# Altium PCB station_de_charge_PCB1.PcbDoc
Units mm, origin at the board's own origin, x right, y up, seen from the top; angles counter-clockwise.
Board outline 95 x 53.5 mm, 2 copper layers (Top Layer, Bottom Layer); 54 components, 28 nets, 125 pads, 13 vias.
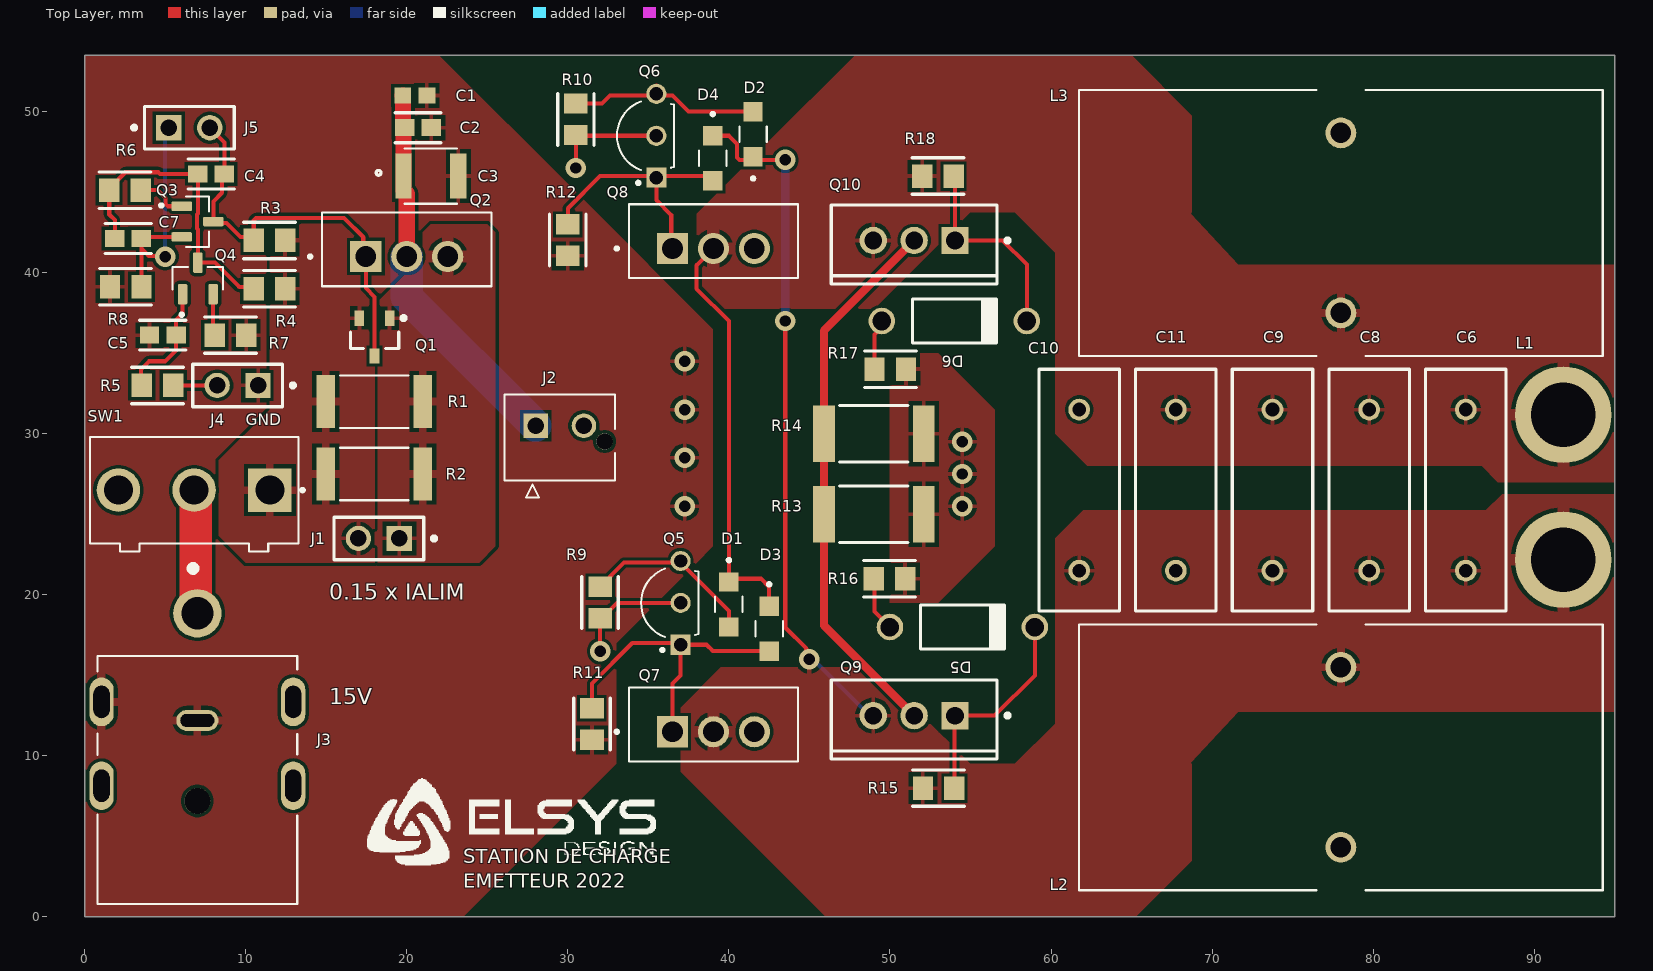
[diagram p0: Top Layer view]
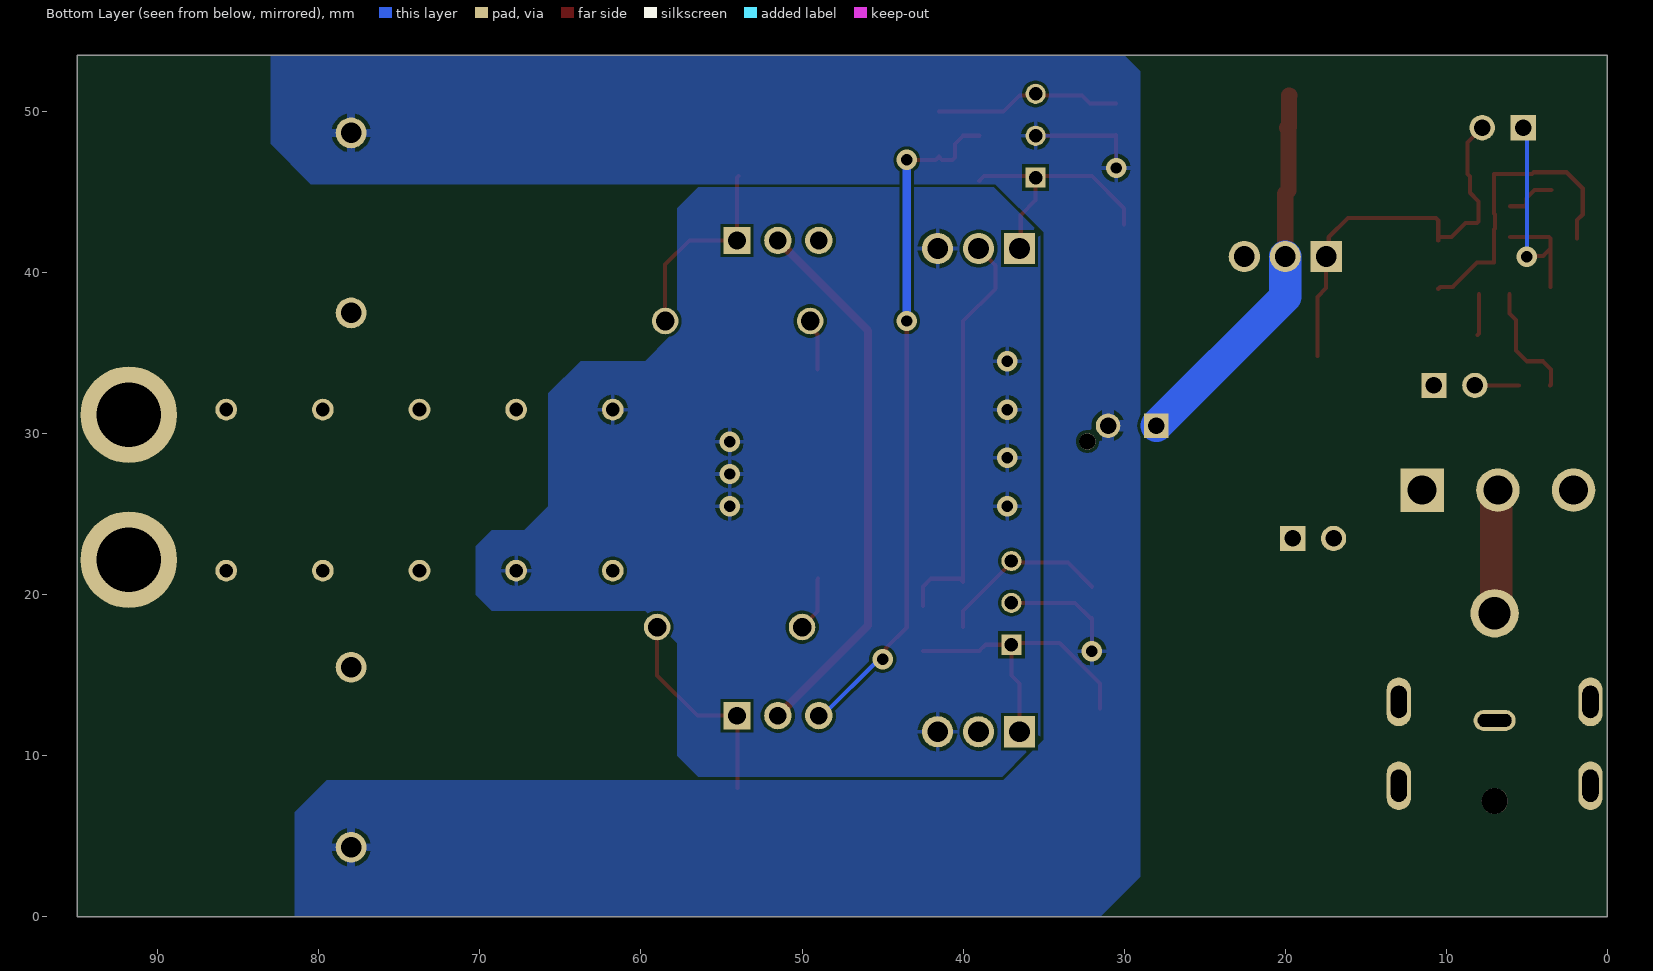
[diagram p1: Bottom Layer view, seen from below]
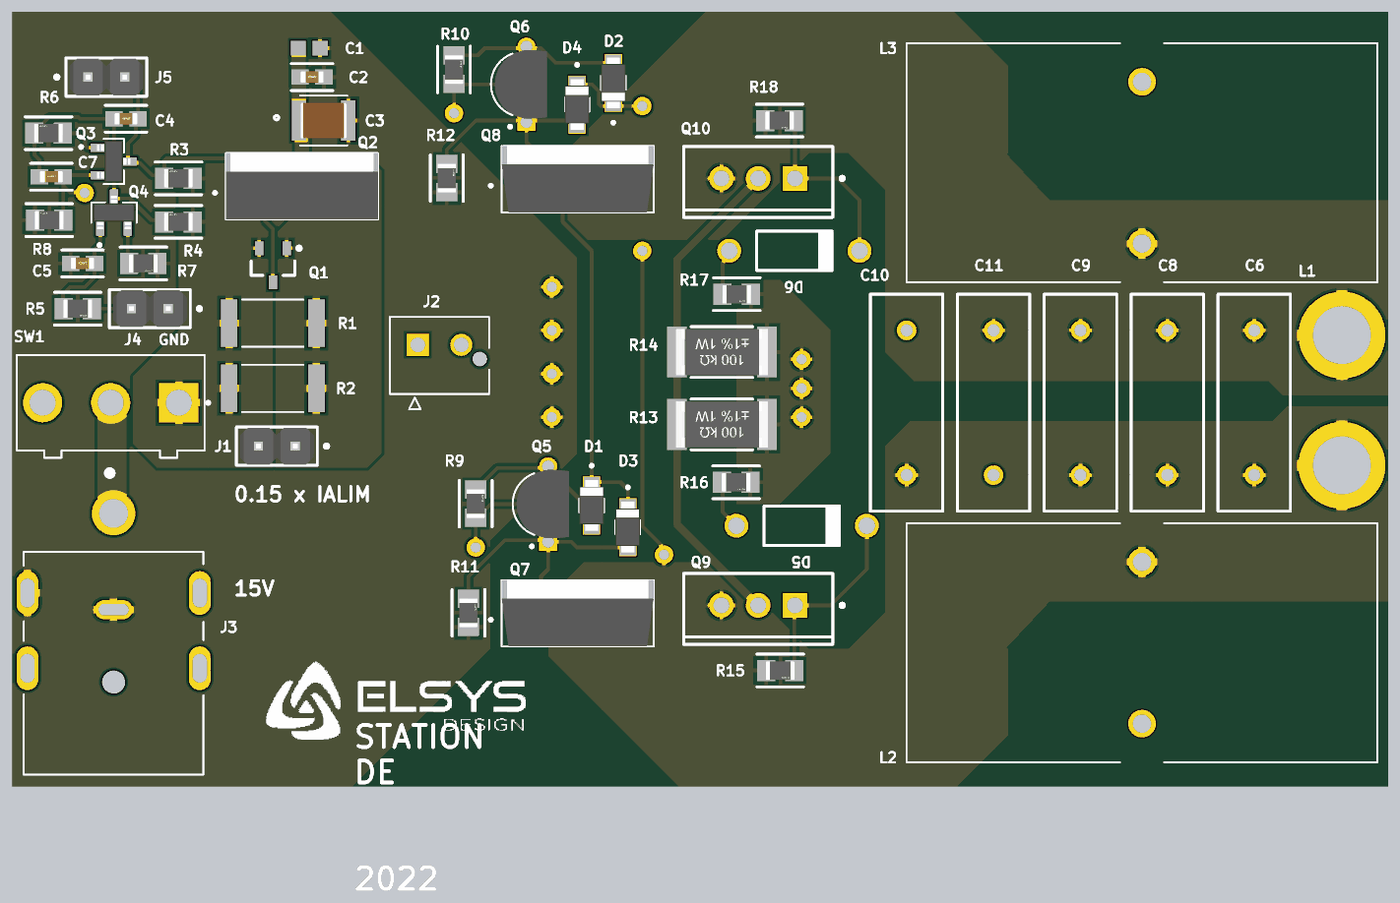
[diagram p2: 3D render of the assembled board from above, using the file's embedded part models]

## Layer stack, top to bottom
Top Solder: solder mask 0.0102, Solder Resist, Dk 3.5
Top Layer: signal copper 0.0356
Dielectric 1: dielectric 0.32, FR-4, Dk 4.8
Bottom Layer: signal copper 0.0356
Bottom Solder: solder mask 0.0102, Solder Resist, Dk 3.5

## Board outline
0,0 0,53.5 95,53.5 95,0

## Design rules (kind name [scope] priority, off if disabled: settings)
Clearance [All] p1: gap=0.2 ignorepadtopadclearanceinfootprint=FALSE
MinimumSolderMaskSliver [All] p1: minsoldermaskwidth=0.008
PolygonConnect [All] p1: connectstyle=Relief reliefconductorwidth=0.254 reliefentries=4 polygonreliefangle="90 Angle" airgapwidth=0.254
RoutingVias [All] p1: holewidth=0.711 width=1.27 viastyle="Through Hole" minholewidth=0.711 minwidth=1.27 maxholewidth=1.27 maxwidth=2
SilkToSolderMaskClearance [IsPad] p1: minsilkscreentomaskgap=0.008 clearancetoexposedcopper=TRUE
SolderMaskExpansion [All] p1: expansion=0.102 istentingtop=FALSE
Width [All] p1: maxlimit=3 minlimit=0.254 preferedwidth=0.254
28 further rules are at their usual default settings.

## Components (designator, comment, footprint, x,y, rotation, side; value= is the part's Value field where it differs from the comment)
C1 "1µF" CAPC1608X90X35NL15T15 20.5,51 r0 top
C2 "100nF" FP-C0603C104K5RAC3121-IPC_A 19.873,49 r0 top
C3 "10µf" CAPC3225X280N 21.5,46 r0 top
C4 "10nF" FP-C0603C104K5RAC3121-IPC_A 7.029,46.123 r0 top
C5 "10nF" FP-C0603C104K5RAC3121-IPC_A 4.029,36.123 r0 top
C6 "22nF 630VDC 10%" R60PF22205040K 85.75,21.5 r90 top
C7 "10nF" FP-C0603C104K5RAC3121-IPC_A 1.877,42.123 r0 top
C8 "22nF 630VDC 10%" R60PF22205040K 79.75,21.5 r90 top
C9 "22nF 630VDC 10%" R60PF22205040K 73.75,21.5 r90 top
C10 "33nF 400VDC" R60PF22205040K 61.75,21.5 r90 top
C11 "33nF 400VDC" R60PF22205040K 67.75,21.5 r90 top
D1 "PMEG6010ER,115" TVS_PTVS13VS1UR,115 40,18 r270 top
D2 "PMEG6010ER,115" TVS_PTVS13VS1UR,115 41.5,50 r90 top
D3 "PMEG6010ER,115" TVS_PTVS13VS1UR,115 42.5,16.5 r270 top
D4 "PMEG6010ER,115" TVS_PTVS13VS1UR,115 39,45.7 r270 top
D5 "1N4757A" FAIR-DO-41-2_V 54.5,18 r0 top
D6 "1N4757A" FAIR-DO-41-2_V 54,37 r0 top
J1 "*" FP-M20-9990246-MFG 18.27,23.5 r180 top
J2 "216571-2002" MOLEX_2165712002 28,30.5 r180 top
J3 "PJ-080BH" CUI_PJ-080BH 7,8.5 r90 top
J4 "M20-9990246" FP-M20-9990246-MFG 9.5,33 r180 top
J5 "M20-9990246" FP-M20-9990246-MFG 6.5,49 r0 top
L1 "loop" loop 91.8,22.175 r180 top
L2 "2212-V-RC" IND_HCTI-220-5.8 78,15.5 r270 top
L3 "2212-V-RC" IND_HCTI-220-5.8 78,37.5 r90 top
Q1 "TMBT3906,LM" FP-TMBT3906 18,36 r270 top
Q2 "IRF9Z30PBF-BE3" TO-220AB-3-package 20,41.453 r0 top
Q3 "BSS84AKVL" SOT95P230X110-3N 6.029,44.123 r0 top
Q4 "BC817K-25R" SOT95P230X110-3N 6.079,38.663 r90 top
Q5 "BC63916-D74Z" TO92127P478H483-3 37,19.5 r90 top
Q6 "BC63916-D74Z" TO92127P478H483-3 35.5,48.5 r90 top
Q7 "SIHF530-GE3" FP-SIHF530-GE3 36.5,11.5 r0 top
Q8 "SIHF530-GE3" FP-SIHF530-GE3 36.5,41.5 r0 top
Q9 "2N6491G" ONSC-TO-220-3-221A-09 51.5,12.5 r270 top
Q10 "2N6491G" ONSC-TO-220-3-221A-09 51.5,42 r270 top
R1 "300mOhm" RESC6331X70N 14.974,32 r0 top
R2 "300mOhm" RESC6331X70N 14.974,27.5 r0 top
R3 "ESR10EZPF4702" FP-ESR10-IPC_A 10.5,42 r0 top
R4 "10kOhm" FP-ESR10-IPC_A 10.5,39 r0 top
R5 "100Ohm" FP-ESR10-IPC_A 5.5,33 r180 top
R6 "1kOhm" FP-ESR10-IPC_A 1.529,45.123 r0 top
R7 "2kOhm" FP-ESR10-IPC_A 10.029,36.123 r180 top
R8 "33kOhm" FP-ESR10-IPC_A 1.575,39.123 r0 top
R9 "1kOhm" FP-ESR10-IPC_A 32,20.5 r270 top
R10 "1kOhm" FP-ESR10-IPC_A 30.5,50.5 r270 top
R11 "10kOhm" FP-ESR10-IPC_A 31.5,12.954 r270 top
R12 "10kOhm" FP-ESR10-IPC_A 30,43 r270 top
R13 "68Ohm 1W" FP-CRGCQ2512-IPC_A 49,25 r180 top
R14 "68Ohm 1W" FP-CRGCQ2512-IPC_A 49,30 r180 top
R15 "ESR10EZPF4702" FP-ESR10-IPC_A 54,8 r180 top
R16 "3.3kOhm" FP-ESR10-IPC_A 50.954,21 r180 top
R17 "3.3kOhm" FP-ESR10-IPC_A 51,34 r180 top
R18 "ESR10EZPF4702" FP-ESR10-IPC_A 53.954,46 r180 top
SW1 "MS12ANW03" SW_MS12ANW03 6.8,26.5 r180 top

## Footprints (in the part's own frame and the unit in brackets; to place one, negate y for a bottom-side part, rotate by r counter-clockwise, add the part's x,y. Pads: shape width x height; smd on the part's side, far side on the other; paste and mask are expansions set on the pad)
CAPC1608X90X35NL15T15 [mm] "Chip Capacitor, 2-Leads, Body 1.60x0.81mm, IPC Medium Density"
  rect 1.05x1 smd: 1(-0.75,0) 2(0.75,0)
  body extent -0.88,-0.48 0.87,0.48, height 0.9
CAPC3225X280N [mm]
  rect 1.01x2.81 smd: 1(-1.7,0) 2(1.7,0)
  silkscreen extent -3.4,-1.72 1.63,1.72, body extent -1.6,-1.25 1.6,1.25, height 2.81
CUI_PJ-080BH [mm]
  round 3 hole 2: 1(10.35,0)
  oval 1.308x2.616 hole 0.8 slot 2.1 at 90 deg: 2(3.7,0)
  oval 3.016x1.508 hole 1 slot 2 at 0 deg: 3(4.85,5.95) 4(-0.35,5.95) 5(-0.35,-5.95) 6(4.85,-5.95)
  round 1.6 hole 1.6 unplated: ""(-1.3,0)
  silkscreen extent -7.7,-6.2 13.34,6.2
FAIR-DO-41-2_V [mm] "2-Leads, Axial leaded, Body 2.72x5.2mm, Pin Spacing 9mm"
  round 1.65 hole 1.15: 1(-4.5,0) 2(4.5,0)
  silkscreen extent -2.6,-1.36 2.6,1.36, body extent -4.93,-1.36 4.93,1.36, height 2.71
FP-C0603C104K5RAC3121-IPC_A [mil]
  rect 47.5x41.66 smd paste+0 mask+0: 1(0,0) 2(65.03,0)
  silkscreen extent -24,-37 89,37, body extent -43,-41 108,41, height 10
FP-CRGCQ2512-IPC_A [mm]
  rect 1.358x3.506 smd paste+0 mask+0: 1(-3.102,0) 2(3.102,0)
  silkscreen extent -2.12,-1.75 2.12,1.75, body extent -4.28,-2.25 4.28,2.25, height 0.25
FP-ESR10-IPC_A [mm]
  rect 1.258x1.462 smd paste+0 mask+0: 1(0,0) 2(1.954,0)
  silkscreen extent -0.63,-1.13 2.58,1.13, body extent -1.13,-1.23 3.08,1.23, height 0.25
FP-M20-9990246-MFG [mm]
  rect 1.57x1.57 hole 1.02 paste-1000 mask+0: 1(-1.27,0)
  round 1.57 hole 1.02 paste-1000 mask+0: 2(1.27,0)
  silkscreen extent -3.55,-1.32 2.79,1.32, body extent -2.89,-1.42 2.89,1.42, height 0.25
FP-SIHF530-GE3 [mm]
  rect 1.935x1.935 hole 1.29: 1(0,0)
  round 1.935 hole 1.29: 2(2.54,0) 3(5.08,0)
  silkscreen extent -3.56,-1.84 7.79,2.75, body extent -2.71,-1.84 7.79,2.75, height 20.2
FP-TMBT3906 [mm] "SOT23, 3-Leads, Body 2,90x2,40mm, Pitch 0,95mm, IPC Medium Density"
  rect 0.95x0.6 smd: 1(-1.175,0.95) 2(-1.175,-0.95) 3(1.175,0)
  silkscreen extent -1.3,-1.5 0.7,1.93, body extent -0.7,-1.5 0.7,1.5, height 1
IND_HCTI-220-5.8 [mil]
  round 75 hole 50: 1(0,0) 2(440,0)
  silkscreen extent -105,-640 545,640
loop [mm]
  round 6 hole 4: 1(0,0) 2(0,-9)
MOLEX_2165712002 [mm]
  rect 1.52x1.52 hole 1.02 mask+0.076: 1(0,0)
  round 1.52 hole 1.02 mask+0.076: 2(-3,0)
  round 1.02 hole 1.02 unplated mask+0.076: ""(-4.28,0.98)
  silkscreen extent -4.92,-1.93 1.92,4.45
ONSC-TO-220-3-221A-09 [mm] "FM, 3-Leads, Body 10.3x4.85mm, Pitch 2.54mm"
  rect 1.7x1.7 hole 1.1: 1(0,2.54)
  round 1.7 hole 1.1: 2(0,0) 3(0,-2.54)
  silkscreen extent -2.2,-5.15 2.7,5.93, body extent -2.18,-5.15 2.67,5.15, height 19.85
R60PF22205040K [mm]
  round 1.35 hole 0.85: 1(0,0) 2(10,0)
  silkscreen extent -2.5,-2.5 12.5,2.5
RESC6331X70N [mm]
  rect 1.15x3.27 smd: 1(0,0) 2(6.026,0)
  silkscreen extent 0.89,-1.63 5.13,1.63
SOT95P230X110-3N [mm]
  rrect25% 1.26x0.59 smd: 1(0,0) 2(0,-1.9) 3(1.96,-0.95)
  silkscreen extent -1.37,-2.52 1.68,0.62, body extent -0.17,-2.4 2.13,0.5, height 1.1
SW_MS12ANW03 [mm]
  rect 2.7x2.7 hole 1.8: 1(-4.7,0)
  round 2.7 hole 1.8: 2(0,0) 3(4.7,0)
  silkscreen extent -6.83,-3.3 6.48,3.8
TO92127P478H483-3 [mm]
  rect 1.25x1.25 hole 0.83: 1(-2.6,0)
  round 1.25 hole 0.83: 2(0,0) 3(2.6,0)
  silkscreen extent -3.02,-1.1 2.13,2.45, body extent -2.38,-1.43 2.38,2.19, height 5.33
TO-220AB-3-package [mm]
  rect 1.94x1.94 hole 1.29: 1(-2.54,-0.453)
  round 1.94 hole 1.29: 2(0,-0.453) 3(2.54,-0.453)
  silkscreen extent -6.1,-2.29 5.25,2.29, body extent -5.25,-2.29 5.25,2.3, height 20.2
TVS_PTVS13VS1UR,115 [mm]
  rect 1.2x1.2 smd paste-0.05: 1(-2.8,0) 2(0,0)
  silkscreen extent -4.25,-0.85 -0.92,0.85, body extent -3.15,-0.85 0.35,0.85, height 1.1

## Part data
C1: library part C0603C105K4RACTU, "Cap Ceramic 1uF 16V X7R 10% SMD 0603 125°C Paper T/R", Capacitance=1uF, Case Code (Imperial)=0603, Case Code (Metric)=1608, Dielectric=X7R, Dielectric Material=Ceramic, Manufacturer=KEMET, Max Operating Temperature=125°C, Min Operating Temperature=-55°C, Package Quantity=4000, Supplier Part Number 1=80-C0603C105K4R, Tolerance=10%, Voltage=16V, Case/Package=0603, Category="Ceramic Capacitors", ComponentLink1Description=https://datasheet.ciiva.com/7823/kem-c1002-x7r-smd-7823997.pdf?src-supplier=Element14, ComponentLink1URL=https://datasheet.ciiva.com/7823/kem-c1002-x7r-smd-7823997.pdf?src-supplier=Element14, ComponentLink2Description=https://datasheet.ciiva.com/22749/kem-c1002-x7r-smd-22749721.pdf?src-supplier=Element14, ComponentLink2URL=https://datasheet.ciiva.com/22749/kem-c1002-x7r-smd-22749721.pdf?src-supplier=Element14, ComponentLink3Description=https://datasheet.ciiva.com/5419/kem-c1002-x7r-smd-5419750.pdf?src-supplier=Mouser, ComponentLink3URL=https://datasheet.ciiva.com/5419/kem-c1002-x7r-smd-5419750.pdf?src-supplier=Mouser, ComponentLink4Description=https://datasheet.ciiva.com/18192/getdatasheetpartid-385479-18192732.pdf?src-supplier=Verical, ComponentLink4URL=https://datasheet.ciiva.com/18192/getdatasheetpartid-385479-18192732.pdf?src-supplier=Verical, Construction=Flat, Contact Plating=Tin,Matte, Depth=0.8mm, Dissipation Factor=3.5%, Height=0.8mm, Length=1.6mm, Manufacturer Part Number=C0603C105K4RACTU, Mount="Surface Mount,PCB", Number of Pins=2, Packaging="Tape and Reel", Pricing 1="1=0,17000, 10=0,08000, 50=0,08000, 100=0,03600, 500=0,02600, 1000=0,02000, 2000=0,01900, 4000=0,01600, 8000=0,01400, 10000=0,01400 (USD)", Radiation Hardening=No, REACH SVHC="No SVHC", RoHS=Yes, RoHS Compliant=Yes, Series=C0603C, Stock 1=3280807, Supplier 1=Mouser, Termination=SMD/SMT, Thickness=0.034inch, Voltage Rating=16V, Voltage Rating (DC)=16V, Width=0.031inch
C2: library part C0603C104K5RAC3121, "Cap Ceramic 0.1uF 50V X7R 10% Pad SMD 0603 125°C T/R", Case/Package=0603, Manufacturer=KEMET, Supplier Part Number 1=80-C603C104K5RAC3121, Category="Ceramic Capacitors", Manufacturer Part Number=C0603C104K5RAC3121, Pricing 1="1=0,13000, 10=0,09200, 50=0,09200, 100=0,04300, 1000=0,02500, 10000=0,01900 (USD)", RoHS=Yes, RoHS Compliant=Yes, Stock 1=3306727, Supplier 1=Mouser
C3: library part C3225X7R2A106K250AC, "Multilayer Ceramic Chip Capacitors, Capacitance=10μF, LxWxT: 3.2x2.5x2.5mm", Manufacturer=TDK, Supplier Part Number 1=810-C3225X7R2A106K25, Manufacturer Part Number=C3225X7R2A106K250AC, Pricing 1="1=1,50000, 10=1,19000, 50=1,19000, 100=0,89100, 1000=0,72000, 10000=0,72000 (USD)", RoHS=No, Stock 1=11549, Supplier 1=Mouser
C4 C5 C7: library part C0603C103K5RAC7013, "Cap Ceramic 0.01uF 50V X7R 10% Pad SMD 0603 125C T/R", Case/Package=0603, Dielectric=X7R, Dielectric Material=Ceramic, Manufacturer=KEMET, Max Operating Temperature=125°C, Min Operating Temperature=-55°C, Package Quantity=4000, Supplier Part Number 1=80-C0603C103K5RC7013, Tolerance=10%, Voltage Rating=50V, Capacitance=10nF, Category="Ceramic Capacitors", ComponentLink1Description=http://components.arrow.com/part/dataview/5297356S5600630N7429?src-supplier=Arrow+Electronics, ComponentLink1URL=http://components.arrow.com/part/dataview/5297356S5600630N7429?src-supplier=Arrow+Electronics, ComponentLink2Description=https://www.distrelec.biz/Web/Downloads/_t/ds/KEM_C1002_X7R_SMD_eng_tds.pdf?mime=application%2Fpdf&src-supplier=Distrelec, ComponentLink2URL=https://www.distrelec.biz/Web/Downloads/_t/ds/KEM_C1002_X7R_SMD_eng_tds.pdf?mime=application%2Fpdf&src-supplier=Distrelec, ComponentLink3Description=https://api.kemet.com/component-edge/download/datasheet/C0603C103K5RAC7013.pdf?src-supplier=Digi-Key, ComponentLink3URL=https://api.kemet.com/component-edge/download/datasheet/C0603C103K5RAC7013.pdf?src-supplier=Digi-Key, Depth=0.8mm, Height=0.8mm, Length=1.6mm, Manufacturer Part Number=C0603C103K5RAC7013, Mount="Surface Mount", Packaging="Tape and Reel", Pricing 1="1=0,13000, 10=0,05100, 50=0,05100, 100=0,04300, 500=0,03000, 1000=0,02500, 2000=0,02300, 4000=0,02000, 10000=0,02000 (USD)", Radiation Hardening=No, RoHS=Yes, Stock 1=21368, Supplier 1=Mouser, Thickness=0.035inch, Voltage Rating (DC)=50V, Width=0.031inch
C6 C8 C9: library part R60PF22205040K, "Cap Film 0.022uF 630V PET 10%( 13 X 4 X 9mm) Radial Wound 10mm 105C Automotive Bag", Capacitance=22nF, Case/Package=Radial, Dielectric=PET, Manufacturer=KEMET, Max Operating Temperature=105°C, Min Operating Temperature=-55°C, Supplier Part Number 1=80-R60PF22205040K, Tolerance=10%, Voltage Rating=630V, Voltage Rating (AC)=220V, Category="Film Capacitors", ComponentLink1Description=http://www.farnell.com/datasheets/1959821.pdf?src-supplier=Farnell, ComponentLink1URL=http://www.farnell.com/datasheets/1959821.pdf?src-supplier=Farnell, ComponentLink2Description=http://www.farnell.com/datasheets/1959821.pdf?src-supplier=Element14, ComponentLink2URL=http://www.farnell.com/datasheets/1959821.pdf?src-supplier=Element14, ComponentLink3Description=http://www.kemet.com/docfinder?Partnumber=R60&src-supplier=Digi-Key, ComponentLink3URL=http://www.kemet.com/docfinder?Partnumber=R60&src-supplier=Digi-Key, Dielectric Material=PET, Height - Seated (Max)=0.394inch, Lead Pitch=0.394inch, Length=0.512inch, Manufacturer Part Number=R60PF22205040K, Mount="Through Hole", Packaging=Bulk, Pricing 1="1=0,67000, 10=0,49600, 50=0,39700, 100=0,34000, 1000=0,22700, 10000=0,21200 (USD)", REACH SVHC="No SVHC", RoHS=Yes, RoHS Compliant=Yes, Stock 1=1035, Supplier 1=Mouser, Termination="PC Pins", Voltage Rating (DC)=630V, Width=0.157inch
C10 C11: library part R76MF233050H3J, "Double Metallized Polypropylene Film Capacitor", Manufacturer=KEMET, Supplier Part Number 1=80-R76MF233050H3J, Category="Film Capacitors", Manufacturer Part Number=R76MF233050H3J, Pricing 1="1=0,69000, 10=0,48900, 50=0,37000, 100=0,32200, 1000=0,20300, 10000=0,19000 (USD)", RoHS=Yes, Stock 1=1718, Supplier 1=Mouser
D1 D2 D3 D4: "DIODE SCHOTTKY 60V 1A SOD123W", Manufacturer=Nexperia, Supplier Part Number 1=771-PMEG6010ER115, Category="Rectifier Diodes", ComponentLink1Description=http://www.farnell.com/datasheets/1383349.pdf?src-supplier=Farnell, ComponentLink1URL=http://www.farnell.com/datasheets/1383349.pdf?src-supplier=Farnell, ComponentLink2Description=https://assets.nexperia.com/documents/data-sheet/PMEG6010ER.pdf?src-supplier=Digi-Key, ComponentLink2URL=https://assets.nexperia.com/documents/data-sheet/PMEG6010ER.pdf?src-supplier=Digi-Key, Manufacturer Part Number=PMEG6010ER,115, Pricing 1="1=0,44000, 10=0,33300, 50=0,33300, 100=0,20700, 500=0,14200, 1000=0,10900, 3000=0,09200, 9000=0,08400, 10000=0,08400, 24000=0,07800, 45000=0,07600 (USD)", RoHS=Yes, RoHS Compliant=Yes, Stock 1=80739, Supplier 1=Mouser
D5 D6: "Diode Zener Single 51V 5% 1000mW 2-Pin DO-41", Case/Package=DO-41-2, Manufacturer="ON Semiconductor / Fairchild", Max Operating Temperature=200°C, Max Power Dissipation=1W, Max Reverse Current=5uA, Min Operating Temperature=-65°C, Package Quantity=1000, Supplier Part Number 1=512-1N4757A, Test Current=5mA, Tolerance=5%, Voltage Rating (DC)=51V, Category="Zener Diodes", ComponentLink1Description=https://datasheet.ciiva.com/4732/1n4757a-188306-4732517.pdf?src-supplier=Mouser, ComponentLink1URL=https://datasheet.ciiva.com/4732/1n4757a-188306-4732517.pdf?src-supplier=Mouser, ComponentLink2Description=https://datasheet.ciiva.com/897/1n4731a-897602.pdf?src-supplier=Digi-Key, ComponentLink2URL=https://datasheet.ciiva.com/897/1n4731a-897602.pdf?src-supplier=Digi-Key, ComponentLink3Description=https://datasheet.ciiva.com/8346/1n4730a-8346458.pdf?src-supplier=Avnet, ComponentLink3URL=https://datasheet.ciiva.com/8346/1n4730a-8346458.pdf?src-supplier=Avnet, ComponentLink4Description=https://datasheet.ciiva.com/16818/1n4757a-16818154.pdf?src-supplier=Future+Electronics, ComponentLink4URL=https://datasheet.ciiva.com/16818/1n4757a-16818154.pdf?src-supplier=Future+Electronics, Element Configuration=Single, Impedance=95R, Lead Free="Lead Free", Manufacturer Part Number=1N4757A, Max Reverse Leakage Current=5uA, Mount="Through Hole", Number of Pins=2, Packaging=Bulk, Power Dissipation=1W, Power Rating=1W, Pricing 1="1=0,35000, 10=0,28600, 50=0,28600, 100=0,15200, 500=0,10000, 1000=0,06800, 3000=0,05300, 9000=0,04500, 10000=0,04500, 24000=0,04200, 45000=0,03800 (USD)", Radiation Hardening=No, RoHS=Yes, RoHS Compliant=Yes, Stock 1=12862, Supplier 1=Mouser, Voltage Tolerance=5%, Weight=0.245g, Working Voltage=51V, Zener Current=5mA, Zener Voltage=51V
J1: library part M20-9990246, "2.54mm (0.1\") Pitch SIL Vertical PC Tail Pin Header, 6.1mm mating pin height, tin, 2 contacts", Case/Package=SIL, Color=Black, Contact Resistance=30mR, Current Rating=3A, Insulation Resistance=10GR, Manufacturer=Harwin, Max Operating Temperature=105°C, Min Operating Temperature=-40°C, Package Quantity=1000, Supplier Part Number 1=855-M20-9990246, Voltage Rating (AC)=750V, Category="Headers and Wire Housings", ComponentLink1Description=https://datasheet.ciiva.com/8046/315376-8046930.pdf?src-supplier=Element14, ComponentLink1URL=https://datasheet.ciiva.com/8046/315376-8046930.pdf?src-supplier=Element14, ComponentLink2Description=https://datasheet.ciiva.com/11745/0900766b81034e61-11745755.pdf?src-supplier=RSComponents, ComponentLink2URL=https://datasheet.ciiva.com/11745/0900766b81034e61-11745755.pdf?src-supplier=RSComponents, ComponentLink3Description=https://datasheet.ciiva.com/22660/1830818-22660571.pdf?src-supplier=Element14, ComponentLink3URL=https://datasheet.ciiva.com/22660/1830818-22660571.pdf?src-supplier=Element14, ComponentLink4Description=https://datasheet.ciiva.com/6833/m20-999-6833368.pdf?src-supplier=Digi-Key, ComponentLink4URL=https://datasheet.ciiva.com/6833/m20-999-6833368.pdf?src-supplier=Digi-Key, ComponentLink5Description=https://datasheet.ciiva.com/26852/getdatasheetpartid-384170-26852203.pdf?src-supplier=Verical, ComponentLink5URL=https://datasheet.ciiva.com/26852/getdatasheetpartid-384170-26852203.pdf?src-supplier=Verical, Connector Type="Male Pin", Contact Material=Brass,Bronze, Contact Mating Length=0.24inch, Contact Plating=Tin, Depth=2.54mm, Gender=Male, Housing Color=Black, Housing Material=Nylon, Length=5.08mm, Manufacturer Part Number=M20-9990246, Max Current Rating=3A, Mount="Through Hole", Number of Contacts=2, Number of Positions=2, Number of Rows=1, Orientation=Straight, Packaging=Bulk, Pitch=2.54mm, Pricing 1="1=0,17000, 10=0,08400, 50=0,08400, 100=0,07000, 500=0,06300, 1000=0,05400, 2000=0,04600, 10000=0,04500, 25000=0,03700, 50000=0,03500 (USD)", Radiation Hardening=No, REACH SVHC="No SVHC", RoHS=Yes, Stock 1=121083, Supplier 1=Mouser, Termination=Solder
J2: "Connector Power Header 2Position 3mm PC Pin Straight Through Hole 2 Terminal 1 Port Tray", Manufacturer=Molex, Supplier Part Number 1=538-216571-2002, Manufacturer Part Number=216571-2002, Pricing 1="1=1,67000, 10=1,19000, 50=1,19000, 100=1,04000, 576=1,02000, 1000=1,02000, 1152=0,89300, 2592=0,87100, 5184=0,84000, 10000=0,84000, 10080=0,80200 (USD)", RoHS=No, Stock 1=4447, Supplier 1=Mouser
J3: "Power Barrel Connector Jack 2.50mm ID (0.098\"), 5.50mm OD (0.217\") Through Hole,", Color=Black, Current Rating=10A, Manufacturer=CUI, Max Operating Temperature=85°C, Min Operating Temperature=-25°C, Supplier Part Number 1=CP-080BHCT-ND, Category=Connectors, ComponentLink1Description=https://www.cui.com/product/resource/digikeypdf/pj-080bh.pdf?src-supplier=Digi-Key, ComponentLink1URL=https://www.cui.com/product/resource/digikeypdf/pj-080bh.pdf?src-supplier=Digi-Key, Connector Type=Jack, Contact Material=Brass, Contact Plating=Silver, Gender=Male, Housing Color=Black, Housing Material=Nylon, Lead Free="Lead Free", Manufacturer Part Number=PJ-080BH, Mount="Through Hole", Number of Conductors=2, Orientation=Horizontal, Packaging="Tape and Reel", RoHS=Yes, RoHS Compliant=Yes, Series=-, Shielding=Shielded, Supplier 1=Digi-Key, Termination=Solder
J4 J5: "2.54mm (0.1\") Pitch SIL Vertical PC Tail Pin Header, 6.1mm mating pin height, tin, 2 contacts", Case/Package=SIL, Color=Black, Contact Resistance=30mR, Current Rating=3A, Insulation Resistance=10GR, Manufacturer=Harwin, Max Operating Temperature=105°C, Min Operating Temperature=-40°C, Package Quantity=1000, Supplier Part Number 1=855-M20-9990246, Voltage Rating (AC)=750V, Category="Headers and Wire Housings", ComponentLink1Description=https://datasheet.ciiva.com/8046/315376-8046930.pdf?src-supplier=Element14, ComponentLink1URL=https://datasheet.ciiva.com/8046/315376-8046930.pdf?src-supplier=Element14, ComponentLink2Description=https://datasheet.ciiva.com/11745/0900766b81034e61-11745755.pdf?src-supplier=RSComponents, ComponentLink2URL=https://datasheet.ciiva.com/11745/0900766b81034e61-11745755.pdf?src-supplier=RSComponents, ComponentLink3Description=https://datasheet.ciiva.com/22660/1830818-22660571.pdf?src-supplier=Element14, ComponentLink3URL=https://datasheet.ciiva.com/22660/1830818-22660571.pdf?src-supplier=Element14, ComponentLink4Description=https://datasheet.ciiva.com/6833/m20-999-6833368.pdf?src-supplier=Digi-Key, ComponentLink4URL=https://datasheet.ciiva.com/6833/m20-999-6833368.pdf?src-supplier=Digi-Key, ComponentLink5Description=https://datasheet.ciiva.com/26852/getdatasheetpartid-384170-26852203.pdf?src-supplier=Verical, ComponentLink5URL=https://datasheet.ciiva.com/26852/getdatasheetpartid-384170-26852203.pdf?src-supplier=Verical, Connector Type="Male Pin", Contact Material=Brass,Bronze, Contact Mating Length=0.24inch, Contact Plating=Tin, Depth=2.54mm, Gender=Male, Housing Color=Black, Housing Material=Nylon, Length=5.08mm, Manufacturer Part Number=M20-9990246, Max Current Rating=3A, Mount="Through Hole", Number of Contacts=2, Number of Positions=2, Number of Rows=1, Orientation=Straight, Packaging=Bulk, Pitch=2.54mm, Pricing 1="1=0,17000, 10=0,08400, 50=0,08400, 100=0,07000, 500=0,06300, 1000=0,05400, 2000=0,04600, 10000=0,04500, 25000=0,03700, 50000=0,03500 (USD)", Radiation Hardening=No, REACH SVHC="No SVHC", RoHS=Yes, Stock 1=121083, Supplier 1=Mouser, Termination=Solder
L2 L3: "Inductor High Current Toroid 100uH/64uH 15% 1KHz 4.4A 56mOhm DCR RDL", Case/Package=Radial, Current Rating=4.4A, DC Resistance (DCR)=56mR, Inductance=100uH, Inductance Tolerance=15%, Manufacturer="Bourns JW Miller", Max Operating Temperature=105°C, Min Operating Temperature=-55°C, Package Quantity=77, Supplier Part Number 1=542-2212-V-RC, Test Frequency=1kHz, Category="Fixed Inductors", ComponentLink1Description=https://datasheet.ciiva.com/11798/0900766b80fa5688-11798051.pdf?src-supplier=RSComponents, ComponentLink1URL=https://datasheet.ciiva.com/11798/0900766b80fa5688-11798051.pdf?src-supplier=RSComponents, ComponentLink2Description=https://datasheet.ciiva.com/6690/2200-series-6690646.pdf?src-supplier=Digi-Key, ComponentLink2URL=https://datasheet.ciiva.com/6690/2200-series-6690646.pdf?src-supplier=Digi-Key, ComponentLink3Description=https://datasheet.ciiva.com/28654/2200-series-28654982.pdf?src-supplier=Element14, ComponentLink3URL=https://datasheet.ciiva.com/28654/2200-series-28654982.pdf?src-supplier=Element14, ComponentLink4Description=https://datasheet.ciiva.com/3076/2200-series-3076522.pdf?src-supplier=Avnet, ComponentLink4URL=https://datasheet.ciiva.com/3076/2200-series-3076522.pdf?src-supplier=Avnet, Contact Plating=Tin, Core Material=Ferrite, DC Current=4.4A, Depth=13.97mm, Diameter=0.95inch, Height - Seated (Max)=0.55inch, Lead Diameter=0.86mm, Lead Free="Lead Free", Lead Pitch=11.176mm, Lead/Base Style=Radial, Manufacturer Part Number=2212-V-RC, Max DC Current=4.4A, Military Standard=Not, Mount="Through Hole,Radial", Number of Pins=2, Packaging=Bulk, Pricing 1="1=4,88000, 10=4,48000, 50=3,72000, 100=2,93000, 1000=2,93000, 10000=2,93000 (USD)", Radiation Hardening=No, REACH SVHC="No SVHC", RMS Current (Irms)=4.4A, RoHS=Yes, RoHS Compliant=Yes, Series=2200, Shielding=Shielded, Stock 1=1501, Supplier 1=Mouser, Termination=Radial, Tolerance=15%, Width=0.55inch
Q1: "TRANSPNP50V0.15ASOT23-3", Case/Package=TO-236-3, Collector Emitter Breakdown Voltage=50V, Collector Emitter Voltage (VCEO)=400mV, Manufacturer=Toshiba, Max Collector Current=150mA, Max Power Dissipation=320mW, Supplier Part Number 1=757-TMBT3906LM, Transition Frequency=250MHz, Category=BJTs, ComponentLink1Description=http://www.mouser.com/ds/2/408/TMBT3906_datasheet_en_20150108-736658.pdf?src-supplier=Mouser, ComponentLink1URL=http://www.mouser.com/ds/2/408/TMBT3906_datasheet_en_20150108-736658.pdf?src-supplier=Mouser, ComponentLink2Description=https://toshiba.semicon-storage.com/info/docget.jsp?did=29746&prodName=TMBT3906&src-supplier=Digi-Key, ComponentLink2URL=https://toshiba.semicon-storage.com/info/docget.jsp?did=29746&prodName=TMBT3906&src-supplier=Digi-Key, Manufacturer Part Number=TMBT3906,LM, Max Breakdown Voltage=50V, Mount="Surface Mount", Packaging="Tape and Reel", Pricing 1="1=0,18000, 10=0,16800, 50=0,16800, 100=0,09100, 500=0,05600, 1000=0,03900, 3000=0,02900, 9000=0,02500, 10000=0,02500, 24000=0,02200, 45000=0,01900 (USD)", RoHS=Yes, Stock 1=7851, Supplier 1=Mouser
Q2: Manufacturer="Vishay Siliconix", Supplier Part Number 1=78-IRF9Z30PBF-BE3, Manufacturer Part Number=IRF9Z30PBF-BE3, Pricing 1="1=2,94000, 10=2,65000, 25=2,50000, 50=2,50000, 100=2,13000, 500=1,75000, 1000=1,44000, 2000=1,40000, 10000=1,40000 (USD)", RoHS=No, Stock 1=1837, Supplier 1=Mouser
Q3: "BSS84AKV/SOT666/SOT6", Manufacturer=Nexperia, Supplier Part Number 1=771-BSS84AKVL, Manufacturer Part Number=BSS84AKVL, Pricing 1="1=0,24000, 10=0,20200, 50=0,20200, 100=0,10800, 500=0,07100, 1000=0,04800, 2500=0,03800, 10000=0,03100 (USD)", RoHS=Yes, RoHS Compliant=Yes, Stock 1=4944, Supplier 1=Mouser
Q4: "BC817K-25H/SOT23/TO-236AB", Manufacturer=Nexperia, Supplier Part Number 1=771-BC817K-25R, Category=BJTs, Manufacturer Part Number=BC817K-25R, Pricing 1="1=0,24000, 10=0,19900, 50=0,19900, 100=0,10600, 1000=0,04800, 10000=0,03100 (USD)", RoHS=No, RoHS Compliant=Yes, Stock 1=50401, Supplier 1=Mouser
Q5 Q6: "NPN Medium Power Transistor", Manufacturer="ON Semiconductor / Fairchild", Supplier Part Number 1=512-BC63916D74Z, Category=BJTs, ComponentLink1Description=https://www.onsemi.com/pub/Collateral/BC63916-D.PDF?src-supplier=Digi-Key, ComponentLink1URL=https://www.onsemi.com/pub/Collateral/BC63916-D.PDF?src-supplier=Digi-Key, Manufacturer Part Number=BC63916-D74Z, Pricing 1="1=0,37000, 10=0,30600, 50=0,30600, 100=0,20800, 1000=0,11700, 10000=0,09500 (USD)", RoHS=Yes, RoHS Compliant=Yes, Stock 1=60363, Supplier 1=Mouser
Q7 Q8: Manufacturer=Vishay, Supplier Part Number 1=78-SIHF530-GE3, Manufacturer Part Number=SIHF530-GE3, Pricing 1="1=0,97000, 10=0,85800, 50=0,85800, 100=0,65700, 1000=0,41600, 10000=0,36600 (USD)", RoHS=No, Stock 1=547, Supplier 1=Mouser
Q9 Q10: "Power Bipolar Transistor, 15A, 8", Case/Package=TO-220-3, Collector Base Voltage (VCBO)=90V, Collector Emitter Breakdown Voltage=80V, Collector Emitter Saturation Voltage=3.5V, Current Rating=15A, Emitter Base Voltage (VEBO)=5V, Frequency=5MHz, Manufacturer="ON Semiconductor", Max Operating Temperature=150°C, Max Power Dissipation=1.8W, Min Operating Temperature=-65°C, Package Quantity=50, Supplier Part Number 1=863-2N6491G, Voltage Rating (DC)=-80V, Category=BJTs, Collector Emitter Voltage (VCEO)=80V, Collector-emitter Voltage-Max=3.5V, ComponentLink1Description=https://datasheet.ciiva.com/15138/getdatasheetpartid-42144-15138735.pdf?src-supplier=Verical, ComponentLink1URL=https://datasheet.ciiva.com/15138/getdatasheetpartid-42144-15138735.pdf?src-supplier=Verical, ComponentLink2Description=https://datasheet.ciiva.com/978/2n6487-d-978689.pdf?src-supplier=Digi-Key, ComponentLink2URL=https://datasheet.ciiva.com/978/2n6487-d-978689.pdf?src-supplier=Digi-Key, ComponentLink3Description=https://datasheet.ciiva.com/1260/2n6487-d-1260672.pdf?src-supplier=Newark, ComponentLink3URL=https://datasheet.ciiva.com/1260/2n6487-d-1260672.pdf?src-supplier=Newark, ComponentLink4Description=https://datasheet.ciiva.com/30480/0900766b8126cbeb-30480658.pdf?src-supplier=RSComponents, ComponentLink4URL=https://datasheet.ciiva.com/30480/0900766b8126cbeb-30480658.pdf?src-supplier=RSComponents, ComponentLink5Description=https://datasheet.ciiva.com/1215/79212-1215972.pdf?src-supplier=Farnell, ComponentLink5URL=https://datasheet.ciiva.com/1215/79212-1215972.pdf?src-supplier=Farnell, ComponentLink6Description=https://datasheet.ciiva.com/3303/2n6487-d-3303896.pdf?src-supplier=Avnet, ComponentLink6URL=https://datasheet.ciiva.com/3303/2n6487-d-3303896.pdf?src-supplier=Avnet, Contact Plating=Tin,Matte, Element Configuration=Single, Gain Bandwidth Product=5MHz, Height=15.75mm, hFE Min=20, Lead Free="Lead Free", Length=10.28mm, Manufacturer Part Number=2N6491G, Max Collector Current=15A, Max Frequency=5MHz, Number of Elements=1, Number of Pins=3, Packaging=Rail/Tube, Polarity=PNP, Power Dissipation=1.8W, Pricing 1="1=1,12000, 10=1,01000, 50=0,95200, 100=0,95200, 1000=0,95200, 10000=0,95200 (USD)", Radiation Hardening=No, REACH SVHC="No SVHC", RoHS=Yes, RoHS Compliant=Yes, Series=-, Stock 1=1110, Supplier 1=Mouser, Transition Frequency=5MHz, Weight=0.01lb, Width=4.82mm
R1 R2: library part CRL2512-JW-R300ELF, "Res Thick Film 2512 0.3 Ohm 5% 1W ±200ppm/°C Molded SMD SMD Embossed Plastic T/R", Case Code (Imperial)=2512, Case Code (Metric)=6432, Manufacturer=Bourns, Max Operating Temperature=125°C, Max Power Dissipation=1W, Min Operating Temperature=-55°C, Package Quantity=4000, Resistance=300mR, Resistor Type="Thick Film", Supplier Part Number 1=652-CRL2512JWR300ELF, Temperature Coefficient=200ppm/°C, Tolerance=5%, Case/Package=2512, Category="Chip SMD Resistors", ComponentLink1Description=https://datasheet.ciiva.com/9120/crl-9120009.pdf?src-supplier=Avnet, ComponentLink1URL=https://datasheet.ciiva.com/9120/crl-9120009.pdf?src-supplier=Avnet, Contact Plating=Tin, Height=0.028inch, Length=0.248inch, Manufacturer Part Number=CRL2512-JW-R300ELF, Mount="Surface Mount", Number of Terminations=2, Packaging="Tape and Reel", Power Rating=1W, Pricing 1="1=0,69000, 10=0,51000, 50=0,51000, 100=0,29700, 1000=0,16700, 10000=0,15600 (USD)", Radiation Hardening=No, RoHS=Yes, RoHS Compliant=Yes, Series=CRL, Stock 1=2644, Supplier 1=Mouser, Termination=SMD/SMT, Width=3.1mm
R3 R15 R18: "Res Thick Film 0805 47K Ohm 1% 0.4W ±100ppm/C Pad SMD Automotive T/R", Case Code (Imperial)=0805, Case Code (Metric)=2012, Manufacturer=Rohm, Max Operating Temperature=155°C, Max Power Dissipation=400mW, Min Operating Temperature=-55°C, Package Quantity=1, Resistance=47kR, Resistor Type="Thick Film", Supplier Part Number 1=755-ESR10EZPF4702, Temperature Coefficient=100ppm/°C, Tolerance=1%, Case/Package=0805, Category="Chip SMD Resistors", ComponentLink1Description=https://datasheet.ciiva.com/2469/esr-2469981.pdf?src-supplier=Digi-Key, ComponentLink1URL=https://datasheet.ciiva.com/2469/esr-2469981.pdf?src-supplier=Digi-Key, ComponentLink2Description=https://datasheet.ciiva.com/2469/esr-2469979.pdf?src-supplier=Digi-Key, ComponentLink2URL=https://datasheet.ciiva.com/2469/esr-2469979.pdf?src-supplier=Digi-Key, ComponentLink3Description=https://datasheet.ciiva.com/2469/esr-2469980.pdf?src-supplier=Digi-Key, ComponentLink3URL=https://datasheet.ciiva.com/2469/esr-2469980.pdf?src-supplier=Digi-Key, Features="Automotive AEC-Q200", Height=0.026inch, Length=0.079inch, Manufacturer Part Number=ESR10EZPF4702, Number of Terminations=2, Packaging="Tape and Reel", Pricing 1="1=0,18000, 10=0,15300, 50=0,15300, 100=0,06000, 1000=0,02600, 2500=0,02300, 5000=0,02000, 10000=0,02000 (USD)", RoHS=Yes, RoHS Compliant=Yes, Series=ESR, Stock 1=31570, Supplier 1=Mouser, Width=0.049inch
R4 R11 R12: library part ESR10EZPF1002, "Res Thick Film 0805 10K Ohm 1% 0.4W ±100ppm/C Pad SMD Automotive T/R", Case Code (Imperial)=0805, Case Code (Metric)=2012, Manufacturer=Rohm, Max Operating Temperature=155°C, Max Power Dissipation=400mW, Min Operating Temperature=-55°C, Package Quantity=1, Resistance=10kR, Resistor Type="Thick Film", Supplier Part Number 1=755-ESR10EZPF1002, Temperature Coefficient=100ppm/°C, Tolerance=1%, Case/Package=0805, Category="Chip SMD Resistors", ComponentLink1Description=https://datasheet.ciiva.com/2469/esr-2469862.pdf?src-supplier=Digi-Key, ComponentLink1URL=https://datasheet.ciiva.com/2469/esr-2469862.pdf?src-supplier=Digi-Key, ComponentLink2Description=https://datasheet.ciiva.com/2469/esr-2469863.pdf?src-supplier=Digi-Key, ComponentLink2URL=https://datasheet.ciiva.com/2469/esr-2469863.pdf?src-supplier=Digi-Key, ComponentLink3Description=https://datasheet.ciiva.com/2469/esr-2469864.pdf?src-supplier=Digi-Key, ComponentLink3URL=https://datasheet.ciiva.com/2469/esr-2469864.pdf?src-supplier=Digi-Key, Features="Automotive AEC-Q200", Height=0.026inch, Length=0.079inch, Manufacturer Part Number=ESR10EZPF1002, Number of Terminations=2, Packaging="Tape and Reel", Pricing 1="1=0,18000, 10=0,15300, 50=0,15300, 100=0,06000, 1000=0,02600, 2500=0,02300, 5000=0,02000, 10000=0,02000 (USD)", RoHS=Yes, RoHS Compliant=Yes, Series=ESR, Stock 1=82018, Supplier 1=Mouser, Width=0.049inch
R5: library part ESR10EZPF1000, "Res Thick Film 0805 100 Ohm 1% 2/5W ±100ppm/°C Molded SMD Paper T/R", Case Code (Imperial)=0805, Case Code (Metric)=2012, Manufacturer=Rohm, Max Operating Temperature=155°C, Max Power Dissipation=400mW, Min Operating Temperature=-55°C, Resistance=100R, Resistor Type="Thick Film", Supplier Part Number 1=755-ESR10EZPF1000, Temperature Coefficient=100ppm/°C, Tolerance=1%, Case/Package=0805, Category="Chip SMD Resistors", ComponentLink1Description=http://www.farnell.com/datasheets/2611941.pdf?src-supplier=Farnell, ComponentLink1URL=http://www.farnell.com/datasheets/2611941.pdf?src-supplier=Farnell, ComponentLink2Description=https://www.rohm.com/datasheet/ESR01MZPF/esr-e?src-supplier=Digi-Key, ComponentLink2URL=https://www.rohm.com/datasheet/ESR01MZPF/esr-e?src-supplier=Digi-Key, ComponentLink3Description=http://www.farnell.com/datasheets/2611941.pdf?src-supplier=Newark, ComponentLink3URL=http://www.farnell.com/datasheets/2611941.pdf?src-supplier=Newark, ComponentLink4Description=http://rohmfs.rohm.com/en/products/databook/datasheet/passive/resistor/chip_resistor/esr.pdf?src-supplier=Avnet, ComponentLink4URL=http://rohmfs.rohm.com/en/products/databook/datasheet/passive/resistor/chip_resistor/esr.pdf?src-supplier=Avnet, Features="Automotive AEC-Q200", Manufacturer Part Number=ESR10EZPF1000, Number of Terminations=2, Packaging="Tape and Reel", Pricing 1="1=0,18000, 10=0,15300, 50=0,15300, 100=0,06000, 1000=0,02600, 10000=0,02000 (USD)", RoHS=Yes, RoHS Compliant=Yes, Series=ESR, Stock 1=17116, Supplier 1=Mouser
R6 R9 R10: library part ESR10EZPF1001, "Res Thick Film 0805 1K Ohm 1% 0.4W ±100ppm/C Epoxy Resin Pad SMD Automotive T/R", Case Code (Imperial)=0805, Case Code (Metric)=2012, Manufacturer=Rohm, Max Operating Temperature=155°C, Max Power Dissipation=400mW, Min Operating Temperature=-55°C, Package Quantity=1, Resistance=1kR, Resistor Type="Thick Film", Supplier Part Number 1=755-ESR10EZPF1001, Temperature Coefficient=100ppm/°C, Tolerance=1%, Case/Package=0805, Category="Chip SMD Resistors", ComponentLink1Description=https://datasheet.ciiva.com/2470/esr-2470004.pdf?src-supplier=Digi-Key, ComponentLink1URL=https://datasheet.ciiva.com/2470/esr-2470004.pdf?src-supplier=Digi-Key, ComponentLink2Description=https://datasheet.ciiva.com/2470/esr-2470005.pdf?src-supplier=Digi-Key, ComponentLink2URL=https://datasheet.ciiva.com/2470/esr-2470005.pdf?src-supplier=Digi-Key, ComponentLink3Description=https://datasheet.ciiva.com/2470/esr-2470003.pdf?src-supplier=Digi-Key, ComponentLink3URL=https://datasheet.ciiva.com/2470/esr-2470003.pdf?src-supplier=Digi-Key, Features="Automotive AEC-Q200", Height=0.026inch, Lead Free="Lead Free", Length=0.079inch, Manufacturer Part Number=ESR10EZPF1001, Number of Terminations=2, Packaging="Tape and Reel", Power Rating=400mW, Pricing 1="1=0,18000, 10=0,15300, 50=0,15300, 100=0,06000, 1000=0,02600, 10000=0,02000 (USD)", RoHS=Yes, RoHS Compliant=Yes, Series=ESR, Size Code=0805, Stock 1=27313, Supplier 1=Mouser, Width=0.049inch
R7: library part ESR10EZPF2001, "Res Thick Film 0805 2K Ohm 1% 2/5W ±100ppm/°C Molded SMD Paper T/R", Case Code (Imperial)=0805, Case Code (Metric)=2012, Manufacturer=Rohm, Max Power Dissipation=400mW, Package Quantity=5000, Resistance=2kR, Resistor Type="Thick Film", Supplier Part Number 1=755-ESR10EZPF2001, Temperature Coefficient=100ppm/°C, Tolerance=1%, Case/Package=0805, Category="Chip SMD Resistors", ComponentLink1Description=http://www1.futureelectronics.com/doc/ROHM%20SEMICONDUCTOR/ESR10EZPD.pdf?src-supplier=Future+Electronics, ComponentLink1URL=http://www1.futureelectronics.com/doc/ROHM%20SEMICONDUCTOR/ESR10EZPD.pdf?src-supplier=Future+Electronics, ComponentLink2Description=https://www.rohm.com/datasheet/ESR01MZPF/esr-e?src-supplier=Digi-Key, ComponentLink2URL=https://www.rohm.com/datasheet/ESR01MZPF/esr-e?src-supplier=Digi-Key, ComponentLink3Description=http://www.rohm.com/web/global/datasheet/ESR01MZPF/esr-e?src-supplier=Digi-Key, ComponentLink3URL=http://www.rohm.com/web/global/datasheet/ESR01MZPF/esr-e?src-supplier=Digi-Key, ComponentLink4Description=http://rohmfs.rohm.com/en/products/databook/datasheet/passive/resistor/chip_resistor/esr.pdf?src-supplier=Avnet, ComponentLink4URL=http://rohmfs.rohm.com/en/products/databook/datasheet/passive/resistor/chip_resistor/esr.pdf?src-supplier=Avnet, Height=0.026inch, Lead Free="Lead Free", Length=0.079inch, Manufacturer Part Number=ESR10EZPF2001, Number of Terminations=2, Packaging="Tape and Reel", Power Rating=400mW, Pricing 1="1=0,18000, 10=0,15300, 50=0,15300, 100=0,06000, 1000=0,02600, 10000=0,02000 (USD)", RoHS=Yes, RoHS Compliant=Yes, Series=ESR10, Size Code=0805, Stock 1=82201, Supplier 1=Mouser, Width=0.049inch
R8: library part ESR10EZPJ333, "Res Thick Film 0805 33K Ohm 5% 0.4W ±200ppm/C Pad SMD Automotive T/R", Case Code (Imperial)=0805, Case Code (Metric)=2012, Manufacturer=Rohm, Max Operating Temperature=155°C, Max Power Dissipation=400mW, Min Operating Temperature=-55°C, Package Quantity=1, Resistance=33kR, Resistor Type="Thick Film", Supplier Part Number 1=755-ESR10EZPJ333, Temperature Coefficient=200ppm/°C, Tolerance=5%, Case/Package=0805, Category="Chip SMD Resistors", ComponentLink1Description=https://datasheet.ciiva.com/2495/esr-2495380.pdf?src-supplier=Digi-Key, ComponentLink1URL=https://datasheet.ciiva.com/2495/esr-2495380.pdf?src-supplier=Digi-Key, ComponentLink2Description=https://datasheet.ciiva.com/2495/esr-2495381.pdf?src-supplier=Digi-Key, ComponentLink2URL=https://datasheet.ciiva.com/2495/esr-2495381.pdf?src-supplier=Digi-Key, ComponentLink3Description=https://datasheet.ciiva.com/2495/esr-2495382.pdf?src-supplier=Digi-Key, ComponentLink3URL=https://datasheet.ciiva.com/2495/esr-2495382.pdf?src-supplier=Digi-Key, Features="Automotive AEC-Q200", Height=0.026inch, Length=0.079inch, Manufacturer Part Number=ESR10EZPJ333, Number of Terminations=2, Packaging="Tape and Reel", Pricing 1="1=0,10000, 10=0,08600, 50=0,08600, 100=0,03300, 1000=0,01500, 10000=0,01100 (USD)", RoHS=Yes, RoHS Compliant=Yes, Series=ESR, Stock 1=12165, Supplier 1=Mouser, Width=0.049inch
R13 R14: library part CRGCQ2512J68R, "Res General Purpose Thick Film 2512 68 Ohm 5% 1W ±200ppm/°C Molded Emboss T/R", Manufacturer="TE Connectivity", Supplier Part Number 1=A130299CT-ND, Category="Chip SMD Resistors", Manufacturer Part Number=CRGCQ2512J68R, Pricing 1="1=0,44000, 10=0,32000, 100=0,12780, 1000=0,06299 (USD)", RoHS=Yes, Stock 1=165536, Supplier 1=Digi-Key
R16 R17: library part ESR10EZPF3301, "Res Thick Film 0805 3.3K Ohm 1% 2/5W ±100ppm/°C Molded SMD SMD Paper T/R", Case Code (Imperial)=0805, Case Code (Metric)=2012, Manufacturer=Rohm, Max Operating Temperature=155°C, Max Power Dissipation=400mW, Min Operating Temperature=-55°C, Resistance=3.3kR, Supplier Part Number 1=755-ESR10EZPF3301, Temperature Coefficient=100ppm/°C, Tolerance=1%, Case/Package=0805, Category="Chip SMD Resistors", ComponentLink1Description=https://datasheet.ciiva.com/16439/esr-16439974.pdf?src-supplier=Future+Electronics, ComponentLink1URL=https://datasheet.ciiva.com/16439/esr-16439974.pdf?src-supplier=Future+Electronics, Features="Automotive AEC-Q200", Lead Free="Lead Free", Manufacturer Part Number=ESR10EZPF3301, Number of Terminations=2, Packaging="Tape and Reel", Power Rating=400mW, Pricing 1="1=0,18000, 10=0,15300, 50=0,15300, 100=0,06000, 1000=0,02600, 10000=0,02000 (USD)", RoHS=Yes, RoHS Compliant=Yes, Series=ESR, Size Code=0805, Stock 1=98, Supplier 1=Mouser
SW1: "Switch Slide ON None ON SPDT Top Slide 6A 250VAC 100000Cycles PC Pins Thru-Hole", Manufacturer="NKK Switches", Supplier Part Number 1=633-MS12ANW03, Category="Slide Switches", ComponentLink1Description=https://datasheet.ciiva.com/24170/msnonilluminated-24170278.pdf?src-supplier=Future+Electronics, ComponentLink1URL=https://datasheet.ciiva.com/24170/msnonilluminated-24170278.pdf?src-supplier=Future+Electronics, ComponentLink2Description=https://datasheet.ciiva.com/15184/getdatasheetpartid-330062-15184172.pdf?src-supplier=Verical, ComponentLink2URL=https://datasheet.ciiva.com/15184/getdatasheetpartid-330062-15184172.pdf?src-supplier=Verical, ComponentLink3Description=https://datasheet.ciiva.com/2889/msnonilluminated-2889265.pdf?src-supplier=Digi-Key, ComponentLink3URL=https://datasheet.ciiva.com/2889/msnonilluminated-2889265.pdf?src-supplier=Digi-Key, Manufacturer Part Number=MS12ANW03, Pricing 1="1=3,96000, 10=3,72000, 25=3,51000, 50=3,42000, 100=3,37000, 250=3,33000, 500=2,74000, 1000=2,56000, 2500=2,39000, 10000=2,39000 (USD)", RoHS=Yes, Stock 1=3041, Supplier 1=Mouser

## Via types
v1: diameter 1.27, hole 0.711, Top Layer to Bottom Layer, 13 vias

## Nets (pads, with @x,y where several pads share a name; then routed paths per layer and width w, separated by ;. In a path a pad name is that pad's centre, name@x,y a point inside that pad or via, vN(x,y) a via of type N, cw(c..) or ccw(c..) an arc to the next point about the centre after c; other vN are vias at no path point)
+12V: J2.2 L2.2 L3.2 Q5.2 Q6.2 R9.2 R10.2 | length 14.5
  Top Layer w0.254: v1(30.5,46.5) R10.2 30.546,48.5 Q6.2 ; v1(32,16.5) R9.2 32.102,18.546 33.056,19.5 Q5.2
A: C6.1 C8.1 C9.1 C10.1 D2.1 D4.1 L1.1 L2.1 Q7.2 Q9.3 R15.2 | length 42.8
  Top Layer w0.254: D4.1 40,48.5 40.5,48 40.5,47.149 40.649,47 41.3,47 D2.1 41.7,47 v1(43.5,47) ; v1(43.5,37) 43.5,17.96 44.806,16.654 44.806,16.194 v1(45,16)
  Bottom Layer w0.254: v1(45,16) 45.23,16 48.73,12.5 Q9.3
  Bottom Layer w0.508: v1(43.5,37) v1(43.5,47)
B: C6.2 C8.2 C9.2 C11.2 D1.1 D3.1 L1.2 L3.1 Q8.2 Q10.3 R18.2 | length 25.9
  Top Layer w0.254: Q8.2 38,40.46 38,39 40,37 D1.1 40.2,21 42,21 42.5,20.5 D3.1
GND: C1.2 C2.2 C3.2 C5.1 C10.2 C11.1 J3.2 J3.3 J4.1 Q7.3 Q8.3 R7.1 R8.1 R11.2 R12.2 R13.1 R14.1 R16.1 R17.1
  other v1: 37.254,25.5 54.5,25.5 54.5,27.5 37.254,28.5 54.5,29.5 37.254,31.5 37.254,34.5
NetC1_1: C1.1 C2.1 C3.1 J2.1 Q2.2 | length 25
  Top Layer w1: C1.1 19.775,51 19.775,49.029 19.804,49 C2.1 19.829,49 19.8,48.971 C3.1 ; Q2.2 20,44.9 C3.1@19.8,45.1 ; C3.1@19.8,45.1 C3.1 ; C3.1@19.8,45.1 C3.1
  Bottom Layer w2: Q2.2 20,38.5 J2.1
NetC4_1: C4.1 C7.1 Q4.3 R4.1 R6.1 | length 18.9
  Top Layer w0.254: C7.1 1.877,43.275 1.529,43.623 1.529,45.225 2.539,46.235 4.568,46.235 4.681,46.123 C4.1 7.029,44.544 7.04,44.533 7.04,43.666 6.978,43.604 6.978,42.738 7.04,42.676 7.04,41.813 7.029,41.802 Q4.3 8.102,40.623 9.602,39.123 10.321,39.123 10.377,39.123 R4.1
NetC4_2: C4.2 J5.2 Q1.3 Q2.1 Q3.3 R3.1 | length 25.7
  Top Layer w0.254: J5.2 8.681,48.089 C4.2 8.529,45.971 8.529,44.963 7.989,44.423 Q3.3 8.089,43.073 8.802,43.073 9.668,42.207 R3.1@10.5,42.207 ; R3.1 R3.1@10.5,42.207 ; Q1.3 18,38.5 17.46,39.04 Q2.1 17.298,41.162 17.298,42.202 16.116,43.384 10.649,43.384 10.5,43.235 R3.1@10.5,42.207
NetC5_2: C5.2 Q4.1 R5.2 | length 7.4
  Top Layer w0.254: R5.2@3.558,33.012 R5.2 3.5,33.046 3.5,34 4,34.5 5,34.5 5.681,35.181 C5.2 5.681,37.064 6.079,37.463 Q4.1
NetC7_2: C7.2 J5.1 Q3.2 R8.2 | length 15.3
  Top Layer w0.254: R8.2 3.529,41.5 ; v1(5,41) 4.955,41.045 3.984,41.045 3.529,41.5 ; Q3.2 3.629,42.223 C7.2 3.529,41.5
  Bottom Layer w0.254: v1(5,41) 5,48.77 J5.1
NetC12_1: 
NetC13_1: 
NetC13_2: 
NetD1_2: D1.2 Q5.3 R9.1 | length 10.9
  Top Layer w0.254: R9.1 33.5,22 37,22 40,19 D1.2
NetD2_2: D2.2 Q6.3 R10.1 | length 12.6
  Top Layer w0.254: R10.1 32.125,50.5 32.625,51 35.245,51 35.5,51.625 Q6.3 35.6,51 36.5,51 37.5,50 D2.2
NetD3_2: D3.2 Q5.1 Q7.1 R11.1 | length 19.5
  Top Layer w0.254: R11.1 31.5,14.5 34,17 37.017,17 37,16.983 Q5.1 ; Q7.1 36.5,14.5 37,15 Q5.1 ; D3.2 39,16.5 38.6,16.9 Q5.1
NetD4_2: D4.2 Q6.1 Q8.1 R12.1 | length 15.7
  Top Layer w0.254: R12.1 30,44 32,46 35.5,46 38.7,46 D4.2 ; Q6.1 35.5,44.5 36.42,43.58 Q8.1@36.42,41.5
NetD5_1: D5.1 R16.2 | length 3.4
  Top Layer w0.254: R16.2 49.046,20.954 49.046,18.954 D5.1
NetD5_2: D5.2 Q9.1 R15.1 | length 13.5
  Top Layer w0.254: R15.1 54,12.46 Q9.1 56.5,12.5 59,15 D5.2
NetD6_1: D6.1 R17.2 | length 3.2
  Top Layer w0.254: R17.2 49.046,36.168 49.5,36.622 D6.1
NetD6_2: D6.2 Q10.1 R18.1 | length 12.6
  Top Layer w0.254: R18.1 54.04,45.914 Q10.1 57,42 58.5,40.5 D6.2
NetD7_1: 
NetJ1_1: J1.1 Q1.1 Q2.3 R1.2 R2.2
NetJ1_2: J1.2 Q1.2 R1.1 R2.1 R3.2 R4.2 SW1.1
NetJ3_1: J3.1 SW1.2 | length 7.7
  Top Layer w0.254: J3.1@6.9,18.95 J3.1
  Top Layer w2: SW1.2 6.9,26.4 J3.1@6.9,18.95
NetJ4_2: J4.2 R5.1 | length 2.7
  Top Layer w0.254: R5.1 J4.2
NetQ3_1: Q3.1 R6.2 | length 3.2
  Top Layer w0.254: R6.2 4.529,45.123 5.029,44.623 5.029,44.272 5.178,44.123 Q3.1
NetQ4_2: Q4.2 R7.2 | length 2.6
  Top Layer w0.254: Q4.2 7.979,36.219 R7.2
NetQ9_2: Q9.2 Q10.2 R13.2 R14.2 | length 34.1
  Top Layer w0.508: Q9.2 45.898,18.102 R13.2 R14.2 45.898,36.398 Q10.2
pads on no net: J2. J3. J3.4 J3.5 J3.6 SW1.3

## Polygon pours and split planes (outlines as drawn)
GND on Top Layer "GND_L01_P036" (solid, pour order 36): 33,9.5 23.5,0 0,0 0,9.5 0,53.5 22,53.5 39,36.5 39,23 33,17
B on Top Layer "B_L01_P027" (solid, pour order 27): 57.75,43.75 54.402,43.75 54.402,53.5 65,53.5 68.75,49.75 68.75,43.756 68.661,43.667 71.617,40.5 95,40.5 95,27 87.75,27 86.75,28 62.25,28 60.25,30 60.25,41.25
A on Top Layer "A_L01_P025" (solid, pour order 25): 54.402,9.5 54.402,0.063 54.464,0 65.25,0 68.75,3.5 68.75,9.494 68.661,9.583 71.617,12.75 95,12.75 95,26.25 88,26.25 87,25.25 62,25.25 60.25,23.5 60.25,12 57.75,9.5
NetJ1_2 on Top Layer "NETJ1_2_L01_P034" (solid, pour order 34): 8.342,23.658 10,22 18,22 18,41.5 16,43.5 11.5,43.5 11.5,31.5 8.342,28.342
NetJ1_1 on Top Layer "NETJ1_1_L01_P035" (solid, pour order 35): 25.5,23 24.5,22 18,22 18,38 21,41 21,42.5 21.5,43 25,43 25.5,42.5
GND on Top Layer "GND_L01_P037" (solid, pour order 37): 50,35 53,35 56.5,31.5 56.5,23 53,19.5 50,19.5
B on Top Layer "B_L01_P028" (solid, pour order 28): 47.833,53.5 59.848,53.5 59.848,43.75 55,43.75 49,37.75 39.75,37.75 38,39.5 38,43.667
A on Top Layer "A_L01_P026" (solid, pour order 26): 37,9 46,0 59.848,0 59.848,9.5 55,9.5 49,15.5 39.5,15.5 37,13
GND on Bottom Layer "GND_L02_P033" (solid, pour order 33): 37.5,8.5 53.652,8.5 53.652,45.5 38,45.5 35,42.5 35,11
+12V on Bottom Layer "+12V_L02_P029" (solid, pour order 29): 30,53.5 53.5,53.5 53.5,45.5 38,45.5 35,42.5 35,11 37.5,8.5 53.5,8.5 53.5,0 31.5,0 29.5,2 29,2.5 29,52.5
GND on Bottom Layer "GND_L02_P032" (solid, pour order 32): 56.25,8.5 52.902,8.5 52.902,45.5 56.25,45.5 57.75,44 57.75,36.5 59.75,34.5 63.75,34.5 65.75,32.5 65.75,25.5 67.25,24 69.25,24 70.25,23 70.25,20 69.25,19 59.75,19 57.75,17 57.75,10
+12V on Bottom Layer "+12V_L02_P031" (solid, pour order 31): 80.5,45.5 53.5,45.5 53.5,53.5 83,53.5 83,48
+12V on Bottom Layer "+12V_L02_P030" (solid, pour order 30): 79.5,8.5 53.5,8.5 53.5,0 81.5,0 81.5,6.5

## Silkscreen, mask and mechanical layers (free items; w line width, h text height)
Top Overlay:
  drawing of 16 lines, arcs and shapes, not listed
  text "GND" at 10,30.525 h0.7
  text "0.15 x IALIM" at 15.2,19.7 h1
  text "15V" at 15.2,13.2 h1
  text "STATION DE CHARGE / EMETTEUR 2022" at 23.5,1.5 h1.52